# Altium PCB PCB1.PcbDoc
Units mil, origin at the board's own origin, x right, y up, seen from the top; angles counter-clockwise.
Board outline 6000 x 4000 mil, 2 copper layers (Top Layer, Bottom Layer); 160 components, 7 nets, 400 pads, 0 vias.
Unrouted connection lines stored in the file: 1.
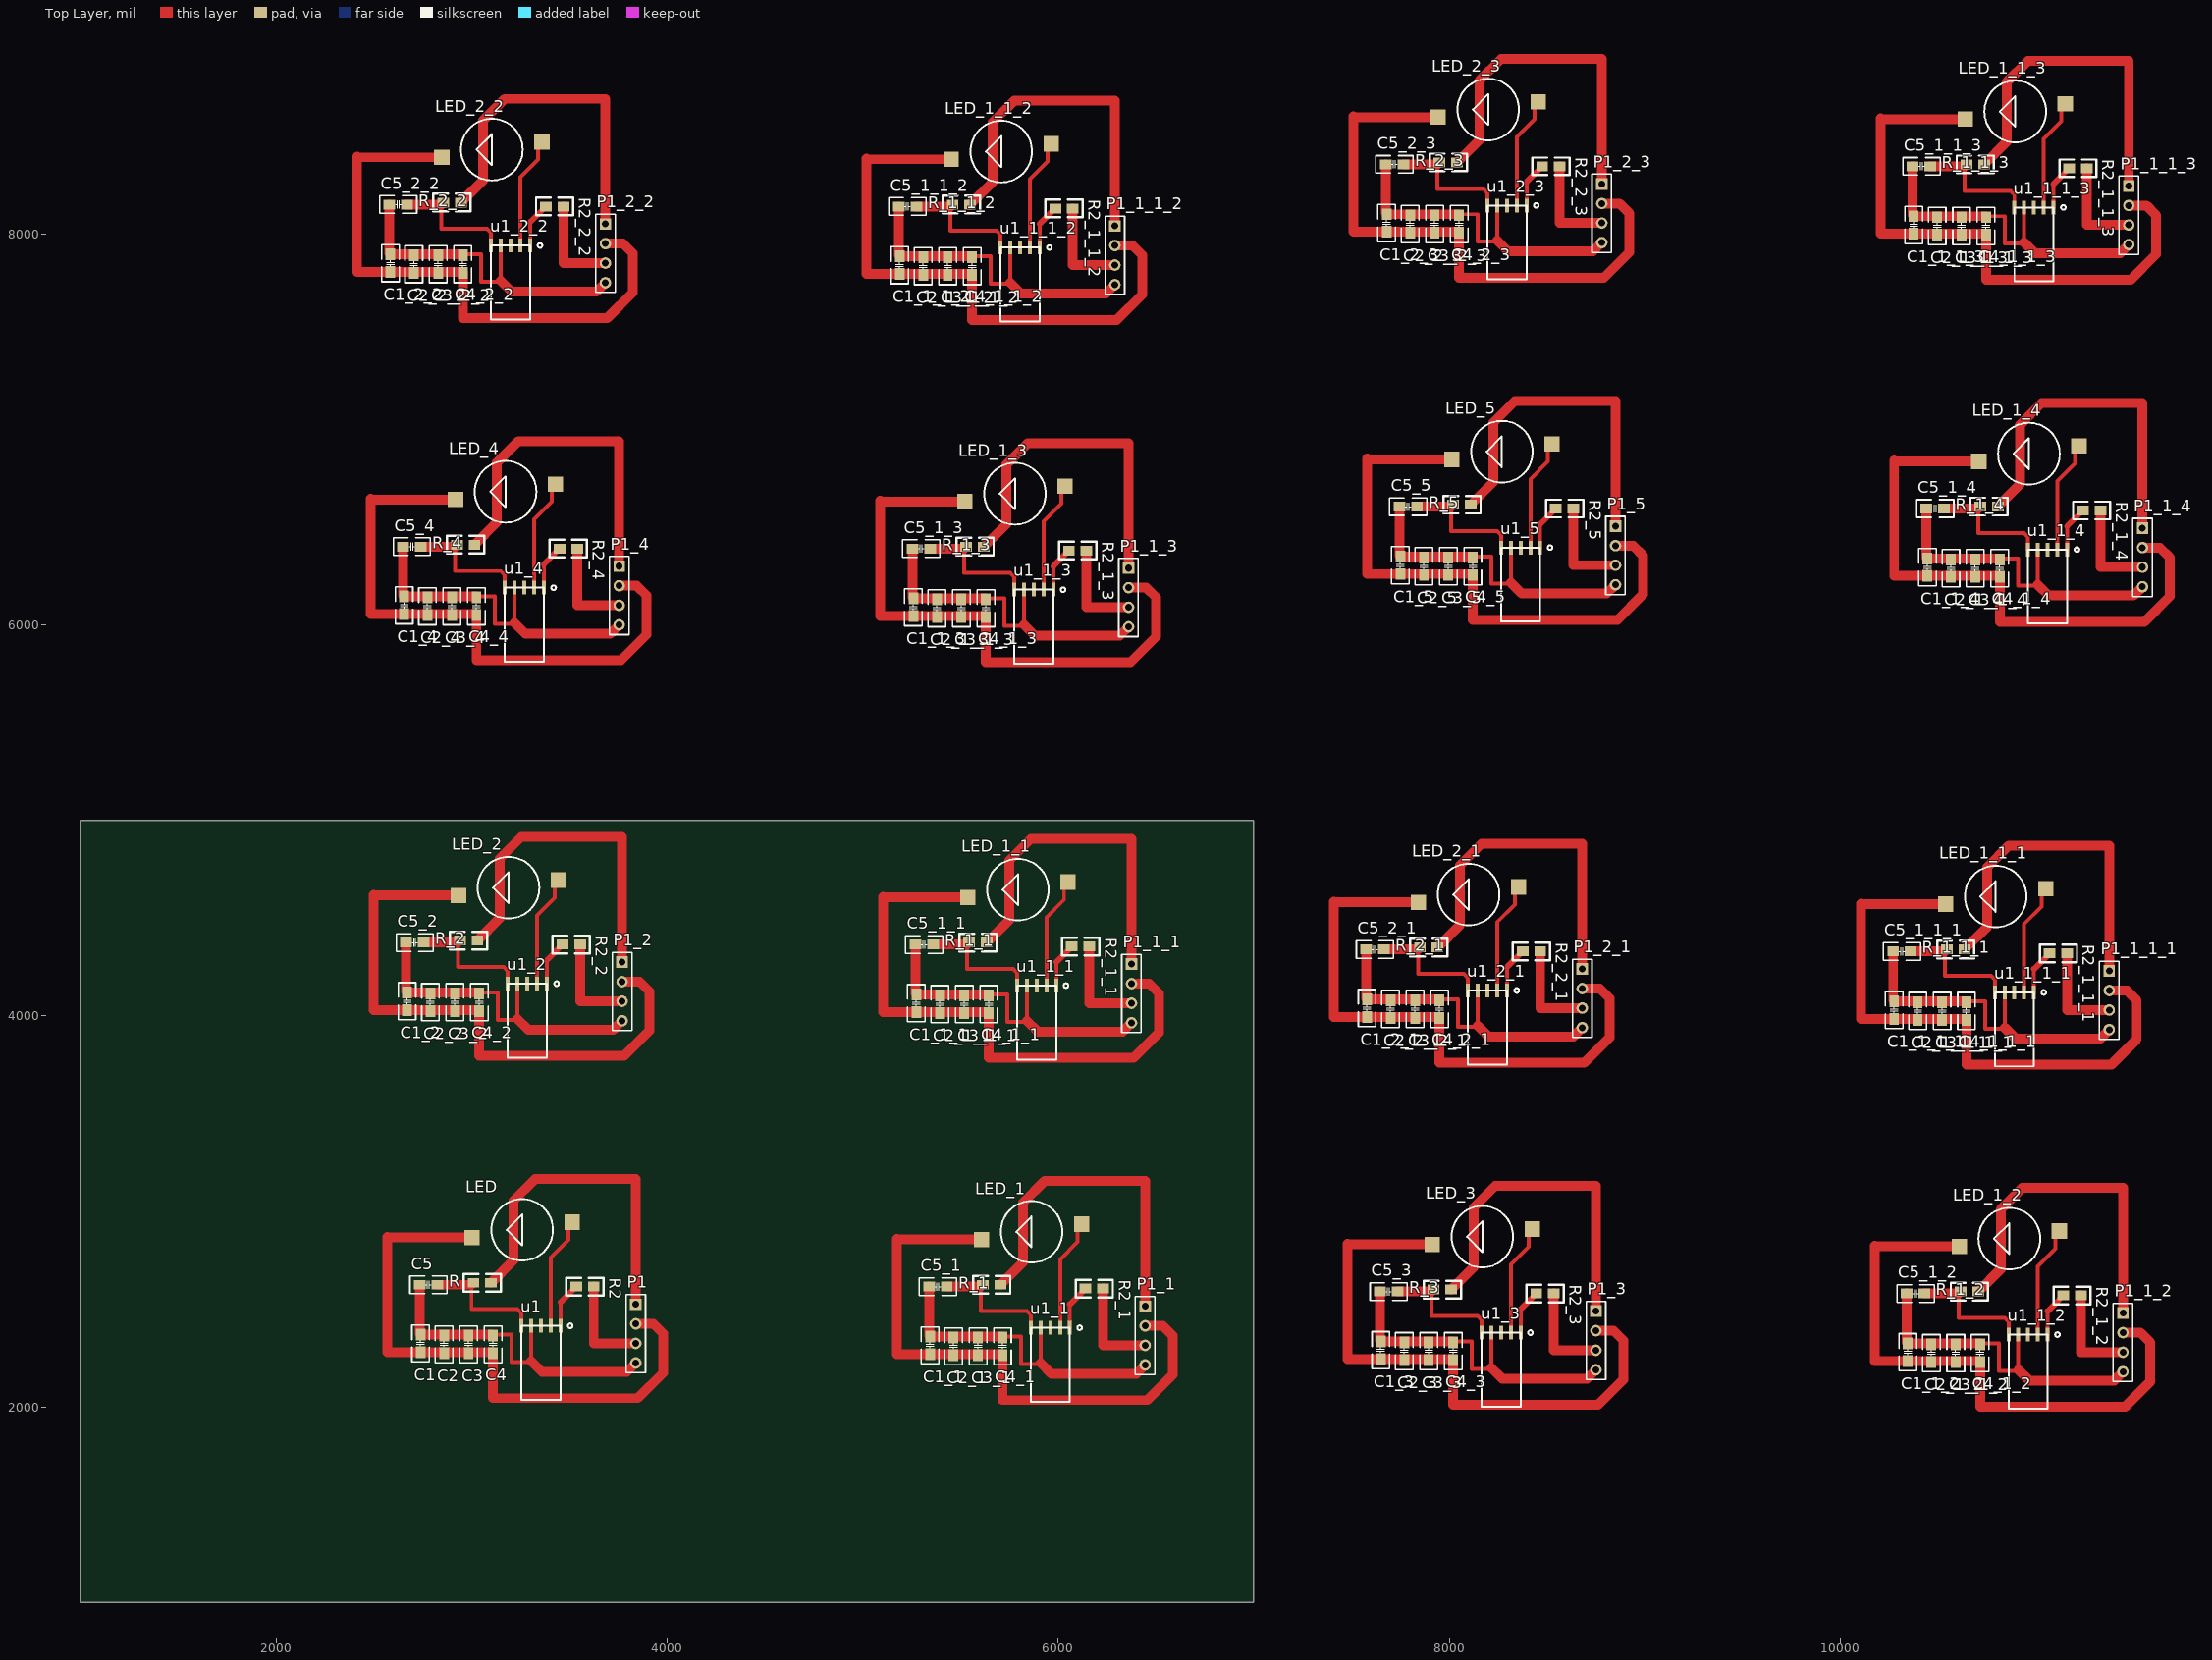
[diagram p0: Top Layer view]
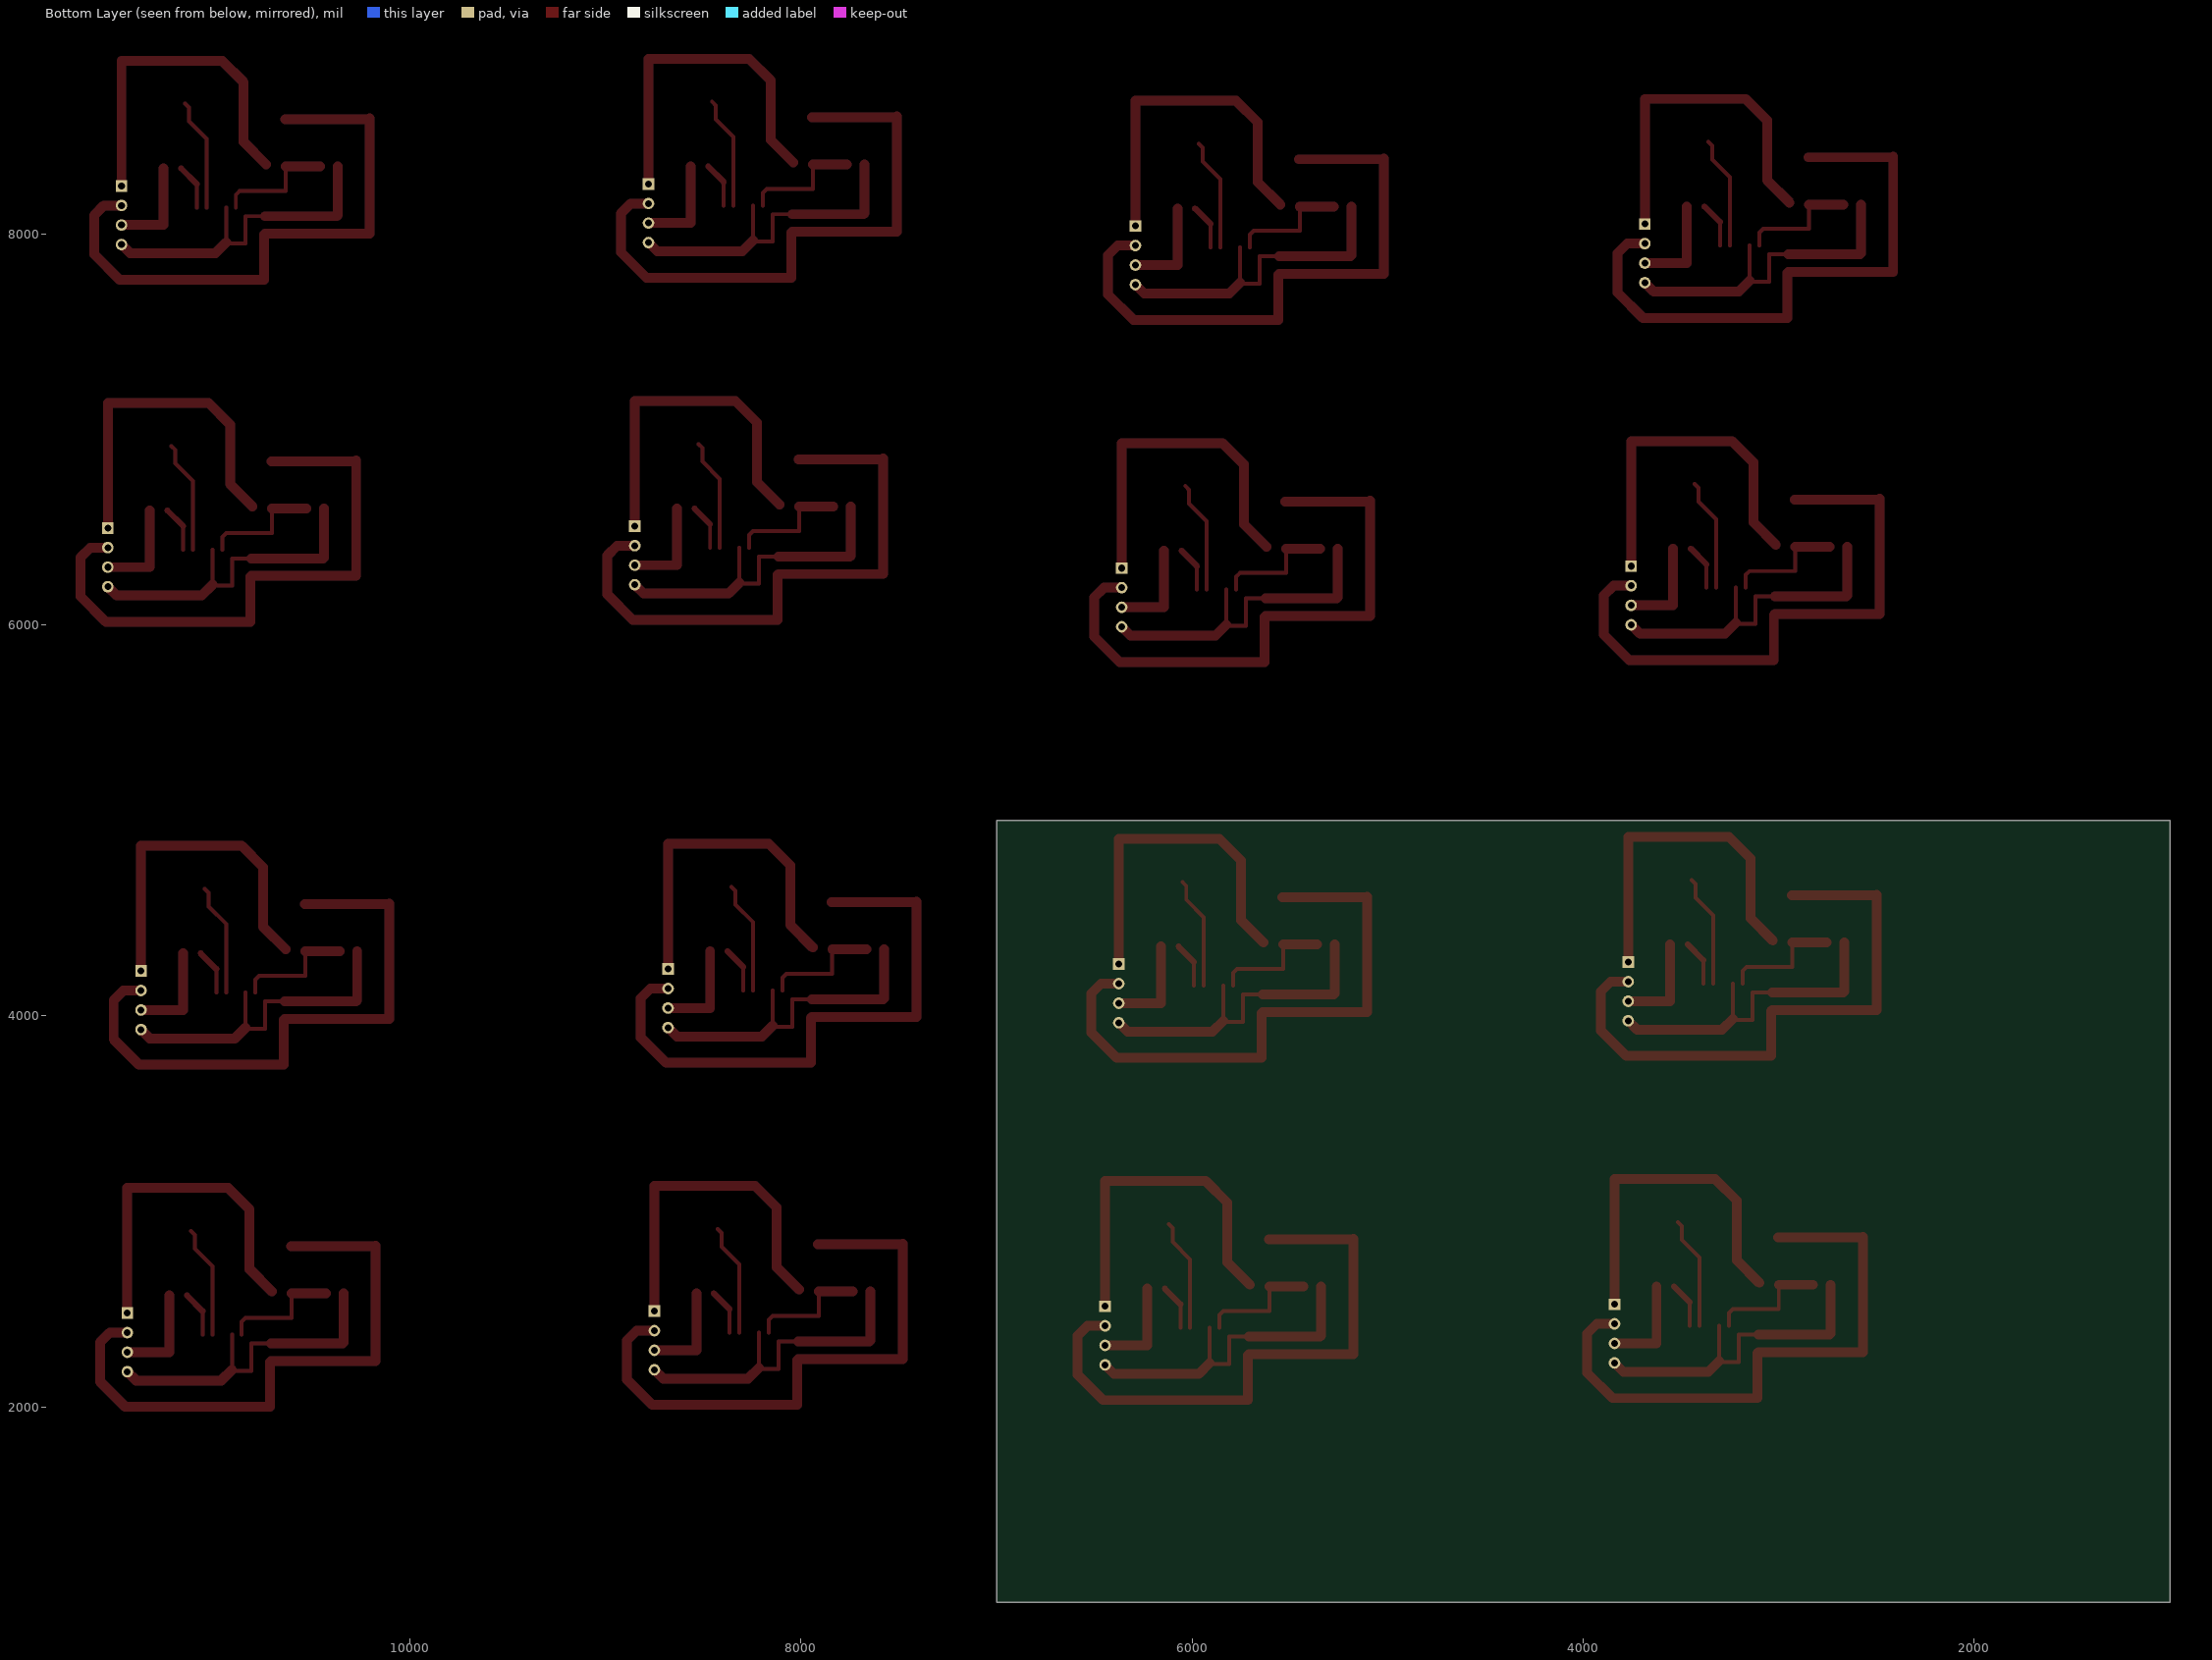
[diagram p1: Bottom Layer view, seen from below]

## Layer stack, top to bottom
Top Layer: signal copper 1.4
Dielectric: dielectric 12.6, FR-4, Dk 4.8
Bottom Layer: signal copper 1.4

## Board outline
1000,1000 7000,1000 7000,5000 1000,5000

## Design rules (kind name [scope] priority, off if disabled: settings)
Clearance [All] p1: gap=10
PolygonConnect [All] p1: connectstyle=Relief reliefconductorwidth=10 reliefentries=4 polygonreliefangle="90 Angle" airgapwidth=10
RoutingVias [All] p1: holewidth=28 width=50 viastyle="Through Hole" minholewidth=28 minwidth=50 maxholewidth=28 maxwidth=50
SolderMaskExpansion [All] p1: expansion=4
Width [All] p1: maxlimit=100 minlimit=20 preferedwidth=50
28 further rules are at their usual default settings.

## Classes and differential pairs
component class Sheet1: C1 C2 C3 C4 C5 LED P1 R R2 u1

## Components (designator, comment, footprint, x,y, rotation, side; value= is the part's Value field where it differs from the comment)
C1 "C_0.1uF" 0805C 2740,2280 r90 top
C1_1 "C_0.1uF" 0805C 5345,2270 r90 top (schematic designator C1)
C1_1_1 "C_0.1uF" 0805C 5275,4020 r90 top (schematic designator C1)
C1_1_1_1 "C_0.1uF" 0805C 10275,3985 r90 top (schematic designator C1)
C1_1_1_2 "C_0.1uF" 0805C 5190,7795 r90 top (schematic designator C1)
C1_1_1_3 "C_0.1uF" 0805C 10375,8000 r90 top (schematic designator C1)
C1_1_2 "C_0.1uF" 0805C 10345,2235 r90 top (schematic designator C1)
C1_1_3 "C_0.1uF" 0805C 5260,6045 r90 top (schematic designator C1)
C1_1_4 "C_0.1uF" 0805C 10445,6250 r90 top (schematic designator C1)
C1_2 "C_0.1uF" 0805C 2670,4030 r90 top (schematic designator C1)
C1_2_1 "C_0.1uF" 0805C 7580,3995 r90 top (schematic designator C1)
C1_2_2 "C_0.1uF" 0805C 2585,7805 r90 top (schematic designator C1)
C1_2_3 "C_0.1uF" 0805C 7680,8010 r90 top (schematic designator C1)
C1_3 "C_0.1uF" 0805C 7650,2245 r90 top (schematic designator C1)
C1_4 "C_0.1uF" 0805C 2655,6055 r90 top (schematic designator C1)
C1_5 "C_0.1uF" 0805C 7750,6260 r90 top (schematic designator C1)
C2 "C_0.1uF" 0805C 2860,2275 r90 top
C2_1 "C_0.1uF" 0805C 5465,2265 r90 top (schematic designator C2)
C2_1_1 "C_0.1uF" 0805C 5395,4015 r90 top (schematic designator C2)
C2_1_1_1 "C_0.1uF" 0805C 10395,3980 r90 top (schematic designator C2)
C2_1_1_2 "C_0.1uF" 0805C 5310,7790 r90 top (schematic designator C2)
C2_1_1_3 "C_0.1uF" 0805C 10495,7995 r90 top (schematic designator C2)
C2_1_2 "C_0.1uF" 0805C 10465,2230 r90 top (schematic designator C2)
C2_1_3 "C_0.1uF" 0805C 5380,6040 r90 top (schematic designator C2)
C2_1_4 "C_0.1uF" 0805C 10565,6245 r90 top (schematic designator C2)
C2_2 "C_0.1uF" 0805C 2790,4025 r90 top (schematic designator C2)
C2_2_1 "C_0.1uF" 0805C 7700,3990 r90 top (schematic designator C2)
C2_2_2 "C_0.1uF" 0805C 2705,7800 r90 top (schematic designator C2)
C2_2_3 "C_0.1uF" 0805C 7800,8005 r90 top (schematic designator C2)
C2_3 "C_0.1uF" 0805C 7770,2240 r90 top (schematic designator C2)
C2_4 "C_0.1uF" 0805C 2775,6050 r90 top (schematic designator C2)
C2_5 "C_0.1uF" 0805C 7870,6255 r90 top (schematic designator C2)
C3 "C_0.1uF" 0805C 2985,2275 r90 top
C3_1 "C_0.1uF" 0805C 5590,2265 r90 top (schematic designator C3)
C3_1_1 "C_0.1uF" 0805C 5520,4015 r90 top (schematic designator C3)
C3_1_1_1 "C_0.1uF" 0805C 10520,3980 r90 top (schematic designator C3)
C3_1_1_2 "C_0.1uF" 0805C 5435,7790 r90 top (schematic designator C3)
C3_1_1_3 "C_0.1uF" 0805C 10620,7995 r90 top (schematic designator C3)
C3_1_2 "C_0.1uF" 0805C 10590,2230 r90 top (schematic designator C3)
C3_1_3 "C_0.1uF" 0805C 5505,6040 r90 top (schematic designator C3)
C3_1_4 "C_0.1uF" 0805C 10690,6245 r90 top (schematic designator C3)
C3_2 "C_0.1uF" 0805C 2915,4025 r90 top (schematic designator C3)
C3_2_1 "C_0.1uF" 0805C 7825,3990 r90 top (schematic designator C3)
C3_2_2 "C_0.1uF" 0805C 2830,7800 r90 top (schematic designator C3)
C3_2_3 "C_0.1uF" 0805C 7925,8005 r90 top (schematic designator C3)
C3_3 "C_0.1uF" 0805C 7895,2240 r90 top (schematic designator C3)
C3_4 "C_0.1uF" 0805C 2900,6050 r90 top (schematic designator C3)
C3_5 "C_0.1uF" 0805C 7995,6255 r90 top (schematic designator C3)
C4 "C_0.1uF" 0805C 3110,2275 r90 top
C4_1 "C_0.1uF" 0805C 5715,2265 r90 top (schematic designator C4)
C4_1_1 "C_0.1uF" 0805C 5645,4015 r90 top (schematic designator C4)
C4_1_1_1 "C_0.1uF" 0805C 10645,3980 r90 top (schematic designator C4)
C4_1_1_2 "C_0.1uF" 0805C 5560,7790 r90 top (schematic designator C4)
C4_1_1_3 "C_0.1uF" 0805C 10745,7995 r90 top (schematic designator C4)
C4_1_2 "C_0.1uF" 0805C 10715,2230 r90 top (schematic designator C4)
C4_1_3 "C_0.1uF" 0805C 5630,6040 r90 top (schematic designator C4)
C4_1_4 "C_0.1uF" 0805C 10815,6245 r90 top (schematic designator C4)
C4_2 "C_0.1uF" 0805C 3040,4025 r90 top (schematic designator C4)
C4_2_1 "C_0.1uF" 0805C 7950,3990 r90 top (schematic designator C4)
C4_2_2 "C_0.1uF" 0805C 2955,7800 r90 top (schematic designator C4)
C4_2_3 "C_0.1uF" 0805C 8050,8005 r90 top (schematic designator C4)
C4_3 "C_0.1uF" 0805C 8020,2240 r90 top (schematic designator C4)
C4_4 "C_0.1uF" 0805C 3025,6050 r90 top (schematic designator C4)
C4_5 "C_0.1uF" 0805C 8120,6255 r90 top (schematic designator C4)
C5 "C_0.1uF" 0805C 2735,2625 r0 top
C5_1 "C_0.1uF" 0805C 5340,2615 r0 top (schematic designator C5)
C5_1_1 "C_0.1uF" 0805C 5270,4365 r0 top (schematic designator C5)
C5_1_1_1 "C_0.1uF" 0805C 10270,4330 r0 top (schematic designator C5)
C5_1_1_2 "C_0.1uF" 0805C 5185,8140 r0 top (schematic designator C5)
C5_1_1_3 "C_0.1uF" 0805C 10370,8345 r0 top (schematic designator C5)
C5_1_2 "C_0.1uF" 0805C 10340,2580 r0 top (schematic designator C5)
C5_1_3 "C_0.1uF" 0805C 5255,6390 r0 top (schematic designator C5)
C5_1_4 "C_0.1uF" 0805C 10440,6595 r0 top (schematic designator C5)
C5_2 "C_0.1uF" 0805C 2665,4375 r0 top (schematic designator C5)
C5_2_1 "C_0.1uF" 0805C 7575,4340 r0 top (schematic designator C5)
C5_2_2 "C_0.1uF" 0805C 2580,8150 r0 top (schematic designator C5)
C5_2_3 "C_0.1uF" 0805C 7675,8355 r0 top (schematic designator C5)
C5_3 "C_0.1uF" 0805C 7645,2590 r0 top (schematic designator C5)
C5_4 "C_0.1uF" 0805C 2650,6400 r0 top (schematic designator C5)
C5_5 "C_0.1uF" 0805C 7745,6605 r0 top (schematic designator C5)
LED "D-LED" led 3515,2945 r180 top
LED_1 "D-LED" led 6120,2935 r180 top (schematic designator LED)
LED_1_1 "D-LED" led 6050,4685 r180 top (schematic designator LED)
LED_1_1_1 "D-LED" led 11050,4650 r180 top (schematic designator LED)
LED_1_1_2 "D-LED" led 5965,8460 r180 top (schematic designator LED)
LED_1_1_3 "D-LED" led 11150,8665 r180 top (schematic designator LED)
LED_1_2 "D-LED" led 11120,2900 r180 top (schematic designator LED)
LED_1_3 "D-LED" led 6035,6710 r180 top (schematic designator LED)
LED_1_4 "D-LED" led 11220,6915 r180 top (schematic designator LED)
LED_2 "D-LED" led 3445,4695 r180 top (schematic designator LED)
LED_2_1 "D-LED" led 8355,4660 r180 top (schematic designator LED)
LED_2_2 "D-LED" led 3360,8470 r180 top (schematic designator LED)
LED_2_3 "D-LED" led 8455,8675 r180 top (schematic designator LED)
LED_3 "D-LED" led 8425,2910 r180 top (schematic designator LED)
LED_4 "D-LED" led 3430,6720 r180 top (schematic designator LED)
LED_5 "D-LED" led 8525,6925 r180 top (schematic designator LED)
P1 "Header 4" HDR1X4 3840,2525 r270 top
P1_1 "Header 4" HDR1X4 6445,2515 r270 top (schematic designator P1)
P1_1_1 "Header 4" HDR1X4 6375,4265 r270 top (schematic designator P1)
P1_1_1_1 "Header 4" HDR1X4 11375,4230 r270 top (schematic designator P1)
P1_1_1_2 "Header 4" HDR1X4 6290,8040 r270 top (schematic designator P1)
P1_1_1_3 "Header 4" HDR1X4 11475,8245 r270 top (schematic designator P1)
P1_1_2 "Header 4" HDR1X4 11445,2480 r270 top (schematic designator P1)
P1_1_3 "Header 4" HDR1X4 6360,6290 r270 top (schematic designator P1)
P1_1_4 "Header 4" HDR1X4 11545,6495 r270 top (schematic designator P1)
P1_2 "Header 4" HDR1X4 3770,4275 r270 top (schematic designator P1)
P1_2_1 "Header 4" HDR1X4 8680,4240 r270 top (schematic designator P1)
P1_2_2 "Header 4" HDR1X4 3685,8050 r270 top (schematic designator P1)
P1_2_3 "Header 4" HDR1X4 8780,8255 r270 top (schematic designator P1)
P1_3 "Header 4" HDR1X4 8750,2490 r270 top (schematic designator P1)
P1_4 "Header 4" HDR1X4 3755,6300 r270 top (schematic designator P1)
P1_5 "Header 4" HDR1X4 8850,6505 r270 top (schematic designator P1)
R "Res2" 0805 3010,2635 r0 top
R2 "Res2" 0805 3625,2615 r180 top (schematic designator 2)
R2_1 "Res2" 0805 6230,2605 r180 top (schematic designator 2)
R2_1_1 "Res2" 0805 6160,4355 r180 top (schematic designator 2)
R2_1_1_1 "Res2" 0805 11160,4320 r180 top (schematic designator 2)
R2_1_1_2 "Res2" 0805 6075,8130 r180 top (schematic designator 2)
R2_1_1_3 "Res2" 0805 11260,8335 r180 top (schematic designator 2)
R2_1_2 "Res2" 0805 11230,2570 r180 top (schematic designator 2)
R2_1_3 "Res2" 0805 6145,6380 r180 top (schematic designator 2)
R2_1_4 "Res2" 0805 11330,6585 r180 top (schematic designator 2)
R2_2 "Res2" 0805 3555,4365 r180 top (schematic designator 2)
R2_2_1 "Res2" 0805 8465,4330 r180 top (schematic designator 2)
R2_2_2 "Res2" 0805 3470,8140 r180 top (schematic designator 2)
R2_2_3 "Res2" 0805 8565,8345 r180 top (schematic designator 2)
R2_3 "Res2" 0805 8535,2580 r180 top (schematic designator 2)
R2_4 "Res2" 0805 3540,6390 r180 top (schematic designator 2)
R2_5 "Res2" 0805 8635,6595 r180 top (schematic designator 2)
R_1 "Res2" 0805 5615,2625 r0 top (schematic designator R)
R_1_1 "Res2" 0805 5545,4375 r0 top (schematic designator R)
R_1_1_1 "Res2" 0805 10545,4340 r0 top (schematic designator R)
R_1_1_2 "Res2" 0805 5460,8150 r0 top (schematic designator R)
R_1_1_3 "Res2" 0805 10645,8355 r0 top (schematic designator R)
R_1_2 "Res2" 0805 10615,2590 r0 top (schematic designator R)
R_1_3 "Res2" 0805 5530,6400 r0 top (schematic designator R)
R_1_4 "Res2" 0805 10715,6605 r0 top (schematic designator R)
R_2 "Res2" 0805 2940,4385 r0 top (schematic designator R)
R_2_1 "Res2" 0805 7850,4350 r0 top (schematic designator R)
R_2_2 "Res2" 0805 2855,8160 r0 top (schematic designator R)
R_2_3 "Res2" 0805 7950,8365 r0 top (schematic designator R)
R_3 "Res2" 0805 7920,2600 r0 top (schematic designator R)
R_4 "Res2" 0805 2925,6410 r0 top (schematic designator R)
R_5 "Res2" 0805 8020,6615 r0 top (schematic designator R)
u1 "Header 5" DD311 3455,2415 r180 top
u1_1 "Header 5" DD311 6060,2405 r180 top (schematic designator u1)
u1_1_1 "Header 5" DD311 5990,4155 r180 top (schematic designator u1)
u1_1_1_1 "Header 5" DD311 10990,4120 r180 top (schematic designator u1)
u1_1_1_2 "Header 5" DD311 5905,7930 r180 top (schematic designator u1)
u1_1_1_3 "Header 5" DD311 11090,8135 r180 top (schematic designator u1)
u1_1_2 "Header 5" DD311 11060,2370 r180 top (schematic designator u1)
u1_1_3 "Header 5" DD311 5975,6180 r180 top (schematic designator u1)
u1_1_4 "Header 5" DD311 11160,6385 r180 top (schematic designator u1)
u1_2 "Header 5" DD311 3385,4165 r180 top (schematic designator u1)
u1_2_1 "Header 5" DD311 8295,4130 r180 top (schematic designator u1)
u1_2_2 "Header 5" DD311 3300,7940 r180 top (schematic designator u1)
u1_2_3 "Header 5" DD311 8395,8145 r180 top (schematic designator u1)
u1_3 "Header 5" DD311 8365,2380 r180 top (schematic designator u1)
u1_4 "Header 5" DD311 3370,6190 r180 top (schematic designator u1)
u1_5 "Header 5" DD311 8465,6395 r180 top (schematic designator u1)

## Footprints (in the part's own frame and the unit in brackets; to place one, negate y for a bottom-side part, rotate by r counter-clockwise, add the part's x,y. Pads: shape width x height; smd on the part's side, far side on the other; paste and mask are expansions set on the pad)
0805 [mil] "1/8W"
  rect 60x50 smd: 1(0,0) 2(90,0)
  silkscreen extent -50,-45 140,45
0805C [mil]
  rect 60x50 smd: 1(0,0) 2(90,0)
  silkscreen extent -50,-45 140,45
DD311 [mil]
  rect 20.08x70 smd: 1(0,0) 2(50,0) 3(100,0) 4(150,0) 5(200,0)
  silkscreen extent -62,-12 200,378
HDR1X4 [mm] "Connector; Header; 4 Position"
  rect 1.5x1.5 hole 0.9: 1(0,0)
  round 1.5 hole 0.9: 2(2.54,0) 3(5.08,0) 4(7.62,0)
  silkscreen extent -1.27,-1.27 8.89,1.27
led [mm]
  rect 2x2 smd: 1(0,0) 2(13,2)
  silkscreen extent 2.5,-3 10.5,5

## Part data
C1 C1_1 C1_1_1 C1_1_1_1 C1_1_1_2 C1_1_1_3 C1_1_2 C1_1_3 C1_1_4 C1_2 C1_2_1 C1_2_2 C1_2_3 C1_3 C1_4 C1_5 C2 C2_1 C2_1_1 C2_1_1_1 C2_1_1_2 C2_1_1_3 C2_1_2 C2_1_3 C2_1_4 C2_2 C2_2_1 C2_2_2 C2_2_3 C2_3 C2_4 C2_5 C3 C3_1 C3_1_1 C3_1_1_1 C3_1_1_2 C3_1_1_3 C3_1_2 C3_1_3 C3_1_4 C3_2 C3_2_1 C3_2_2 C3_2_3 C3_3 C3_4 C3_5 C4 C4_1 C4_1_1 C4_1_1_1 C4_1_1_2 C4_1_1_3 C4_1_2 C4_1_3 C4_1_4 C4_2 C4_2_1 C4_2_2 C4_2_3 C4_3 C4_4 C4_5 C5 C5_1 C5_1_1 C5_1_1_1 C5_1_1_2 C5_1_1_3 C5_1_2 C5_1_3 C5_1_4 C5_2 C5_2_1 C5_2_2 C5_2_3 C5_3 C5_4 C5_5: "SMD-CAP"
LED LED_1 LED_1_1 LED_1_1_1 LED_1_1_2 LED_1_1_3 LED_1_2 LED_1_3 LED_1_4 LED_2 LED_2_1 LED_2_2 LED_2_3 LED_3 LED_4 LED_5: "LED"
P1 P1_1 P1_1_1 P1_1_1_1 P1_1_1_2 P1_1_1_3 P1_1_2 P1_1_3 P1_1_4 P1_2 P1_2_1 P1_2_2 P1_2_3 P1_3 P1_4 P1_5: "Header, 4-Pin"
R R2 R2_1 R2_1_1 R2_1_1_1 R2_1_1_2 R2_1_1_3 R2_1_2 R2_1_3 R2_1_4 R2_2 R2_2_1 R2_2_2 R2_2_3 R2_3 R2_4 R2_5 R_1 R_1_1 R_1_1_1 R_1_1_2 R_1_1_3 R_1_2 R_1_3 R_1_4 R_2 R_2_1 R_2_2 R_2_3 R_3 R_4 R_5: "Resistor"
u1 u1_1 u1_1_1 u1_1_1_1 u1_1_1_2 u1_1_1_3 u1_1_2 u1_1_3 u1_1_4 u1_2 u1_2_1 u1_2_2 u1_2_3 u1_3 u1_4 u1_5: "Header, 5-Pin"

## Nets (pads, with @x,y where several pads share a name; then routed paths per layer and width w, separated by ;. In a path a pad name is that pad's centre, name@x,y a point inside that pad or via, vN(x,y) a via of type N, cw(c..) or ccw(c..) an arc to the next point about the centre after c; other vN are vias at no path point)
5V: C1.1 C2.1 C3.1 C4.1 LED.2 P1.2 | length 3081.4
  Top Layer w50: LED.2 2573.74,2866.26 2570,2870 2570,2280 C1.1 3105,2280 C4.1 3110,2045 3850,2045 3980,2175 3980,2375 3930,2425 P1.2
12V: P1.3 R2.1 | length 505
  Top Layer w50: R2.1 3625,2325 P1.3
GND: C1.2 C2.2 C3.2 C4.2 C5.1 P1.4 u1.3 u1.4 | length 1733.5
  Top Layer w20: C4.2@3105,2370 3205,2370 3205,2230 3320,2230 ; 3305,2235 u1.4
  Top Layer w50: C5.1 2735,2375 C1.2 C4.2@3105,2370 ; 3305,2235 3360,2180 3795,2180 P1.4
Net2_2: R2.2 u1.1 | length 233.1
  Top Layer w20: u1.1 3455,2535
  Top Layer w30: 3455,2535 R2.2
NetC5_2: C5.2 R.1 u1.5 | length 628.3
  Top Layer w20: R.1@3000,2625 3000,2500 3235,2500 3255,2480 u1.5
  Top Layer w50: C5.2 R.1@3000,2625
NetLED_A: LED.1 u1.2 | length 575.6
  Top Layer w20: u1.2 3405,2765 3495,2855 3495,2925 LED.1
TX: P1.1 R.2 | length 1778.2
  Top Layer w50: R.2 3215,2750 3215,3055 3325,3165 3840,3165 P1.1
pads on no net: C1_1.1 C1_1.2 C1_1_1.1 C1_1_1.2 C1_1_1_1.1 C1_1_1_1.2 C1_1_1_2.1 C1_1_1_2.2 C1_1_1_3.1 C1_1_1_3.2 C1_1_2.1 C1_1_2.2 C1_1_3.1 C1_1_3.2 C1_1_4.1 C1_1_4.2 C1_2.1 C1_2.2 C1_2_1.1 C1_2_1.2 C1_2_2.1 C1_2_2.2 C1_2_3.1 C1_2_3.2 C1_3.1 C1_3.2 C1_4.1 C1_4.2 C1_5.1 C1_5.2 C2_1.1 C2_1.2 C2_1_1.1 C2_1_1.2 C2_1_1_1.1 C2_1_1_1.2 C2_1_1_2.1 C2_1_1_2.2 C2_1_1_3.1 C2_1_1_3.2 C2_1_2.1 C2_1_2.2 C2_1_3.1 C2_1_3.2 C2_1_4.1 C2_1_4.2 C2_2.1 C2_2.2 C2_2_1.1 C2_2_1.2 C2_2_2.1 C2_2_2.2 C2_2_3.1 C2_2_3.2 C2_3.1 C2_3.2 C2_4.1 C2_4.2 C2_5.1 C2_5.2 C3_1.1 C3_1.2 C3_1_1.1 C3_1_1.2 C3_1_1_1.1 C3_1_1_1.2 C3_1_1_2.1 C3_1_1_2.2 C3_1_1_3.1 C3_1_1_3.2 C3_1_2.1 C3_1_2.2 C3_1_3.1 C3_1_3.2 C3_1_4.1 C3_1_4.2 C3_2.1 C3_2.2 C3_2_1.1 C3_2_1.2 C3_2_2.1 C3_2_2.2 C3_2_3.1 C3_2_3.2 C3_3.1 C3_3.2 C3_4.1 C3_4.2 C3_5.1 C3_5.2 C4_1.1 C4_1.2 C4_1_1.1 C4_1_1.2 C4_1_1_1.1 C4_1_1_1.2 C4_1_1_2.1 C4_1_1_2.2 C4_1_1_3.1 C4_1_1_3.2 C4_1_2.1 C4_1_2.2 C4_1_3.1 C4_1_3.2 C4_1_4.1 C4_1_4.2 C4_2.1 C4_2.2 C4_2_1.1 C4_2_1.2 C4_2_2.1 C4_2_2.2 C4_2_3.1 C4_2_3.2 C4_3.1 C4_3.2 C4_4.1 C4_4.2 C4_5.1 C4_5.2 C5_1.1 C5_1.2 C5_1_1.1 C5_1_1.2 C5_1_1_1.1 C5_1_1_1.2 C5_1_1_2.1 C5_1_1_2.2 C5_1_1_3.1 C5_1_1_3.2 C5_1_2.1 C5_1_2.2 C5_1_3.1 C5_1_3.2 C5_1_4.1 C5_1_4.2 C5_2.1 C5_2.2 C5_2_1.1 C5_2_1.2 C5_2_2.1 C5_2_2.2 C5_2_3.1 C5_2_3.2 C5_3.1 C5_3.2 C5_4.1 C5_4.2 C5_5.1 C5_5.2 LED_1.1 LED_1.2 LED_1_1.1 LED_1_1.2 LED_1_1_1.1 LED_1_1_1.2 LED_1_1_2.1 LED_1_1_2.2 LED_1_1_3.1 LED_1_1_3.2 LED_1_2.1 LED_1_2.2 LED_1_3.1 LED_1_3.2 LED_1_4.1 LED_1_4.2 LED_2.1 LED_2.2 LED_2_1.1 LED_2_1.2 LED_2_2.1 LED_2_2.2 LED_2_3.1 LED_2_3.2 LED_3.1 LED_3.2 LED_4.1 LED_4.2 LED_5.1 LED_5.2 P1_1.1 P1_1.2 P1_1.3 P1_1.4 P1_1_1.1 P1_1_1.2 P1_1_1.3 P1_1_1.4 P1_1_1_1.1 P1_1_1_1.2 P1_1_1_1.3 P1_1_1_1.4 P1_1_1_2.1 P1_1_1_2.2 P1_1_1_2.3 P1_1_1_2.4 P1_1_1_3.1 P1_1_1_3.2 P1_1_1_3.3 P1_1_1_3.4 P1_1_2.1 P1_1_2.2 P1_1_2.3 P1_1_2.4 P1_1_3.1 P1_1_3.2 P1_1_3.3 P1_1_3.4 P1_1_4.1 P1_1_4.2 P1_1_4.3 P1_1_4.4 P1_2.1 P1_2.2 P1_2.3 P1_2.4 P1_2_1.1 P1_2_1.2 P1_2_1.3 P1_2_1.4 P1_2_2.1 P1_2_2.2 P1_2_2.3 P1_2_2.4 P1_2_3.1 P1_2_3.2 P1_2_3.3 P1_2_3.4 P1_3.1 P1_3.2 P1_3.3 P1_3.4 P1_4.1 P1_4.2 P1_4.3 P1_4.4 P1_5.1 P1_5.2 P1_5.3 P1_5.4 R2_1.1 R2_1.2 R2_1_1.1 R2_1_1.2 R2_1_1_1.1 R2_1_1_1.2 R2_1_1_2.1 R2_1_1_2.2 R2_1_1_3.1 R2_1_1_3.2 R2_1_2.1 R2_1_2.2 R2_1_3.1 R2_1_3.2 R2_1_4.1 R2_1_4.2 R2_2.1 R2_2.2 R2_2_1.1 R2_2_1.2 R2_2_2.1 R2_2_2.2 R2_2_3.1 R2_2_3.2 R2_3.1 R2_3.2 R2_4.1 R2_4.2 R2_5.1 R2_5.2 R_1.1 R_1.2 R_1_1.1 R_1_1.2 R_1_1_1.1 R_1_1_1.2 R_1_1_2.1 R_1_1_2.2 R_1_1_3.1 R_1_1_3.2 R_1_2.1 R_1_2.2 R_1_3.1 R_1_3.2 R_1_4.1 R_1_4.2 R_2.1 R_2.2 R_2_1.1 R_2_1.2 R_2_2.1 R_2_2.2 R_2_3.1 R_2_3.2 R_3.1 R_3.2 R_4.1 R_4.2 R_5.1 R_5.2 u1_1.1 u1_1.2 u1_1.3 u1_1.4 u1_1.5 u1_1_1.1 u1_1_1.2 u1_1_1.3 u1_1_1.4 u1_1_1.5 u1_1_1_1.1 u1_1_1_1.2 u1_1_1_1.3 u1_1_1_1.4 u1_1_1_1.5 u1_1_1_2.1 u1_1_1_2.2 u1_1_1_2.3 u1_1_1_2.4 u1_1_1_2.5 u1_1_1_3.1 u1_1_1_3.2 u1_1_1_3.3 u1_1_1_3.4 u1_1_1_3.5 u1_1_2.1 u1_1_2.2 u1_1_2.3 u1_1_2.4 u1_1_2.5 u1_1_3.1 u1_1_3.2 u1_1_3.3 u1_1_3.4 u1_1_3.5 u1_1_4.1 u1_1_4.2 u1_1_4.3 u1_1_4.4 u1_1_4.5 u1_2.1 u1_2.2 u1_2.3 u1_2.4 u1_2.5 u1_2_1.1 u1_2_1.2 u1_2_1.3 u1_2_1.4 u1_2_1.5 u1_2_2.1 u1_2_2.2 u1_2_2.3 u1_2_2.4 u1_2_2.5 u1_2_3.1 u1_2_3.2 u1_2_3.3 u1_2_3.4 u1_2_3.5 u1_3.1 u1_3.2 u1_3.3 u1_3.4 u1_3.5 u1_4.1 u1_4.2 u1_4.3 u1_4.4 u1_4.5 u1_5.1 u1_5.2 u1_5.3 u1_5.4 u1_5.5
copper on no net: | length 128025.6
  Top Layer w20: 2845,8150 2845,8025 3080,8025 3100,8005 3100,7940 ; 2915,6400 2915,6275 3150,6275 3170,6255 3170,6190 ; 2930,4375 2930,4250 3165,4250 3185,4230 3185,4165 ; 2950,7895 3050,7895 3050,7755 3165,7755 ; 3020,6145 3120,6145 3120,6005 3235,6005 ; 3035,4120 3135,4120 3135,3980 3250,3980 ; 3150,7760 3150,7940 ; 3220,6010 3220,6190 ; 3235,3985 3235,4165 ; 3250,7940 3250,8290 3340,8380 3340,8450 3360,8470 ; 3300,7940 3300,8060 ; 3320,6190 3320,6540 3410,6630 3410,6700 3430,6720 ; 3335,4165 3335,4515 3425,4605 3425,4675 3445,4695 ; 3370,6190 3370,6310 ; 3385,4165 3385,4285 ; 5450,8140 5450,8015 5685,8015 5705,7995 5705,7930 ; 5520,6390 5520,6265 5755,6265 5775,6245 5775,6180 ; 5535,4365 5535,4240 5770,4240 5790,4220 5790,4155 ; 5555,7885 5655,7885 5655,7745 5770,7745 ; 5605,2615 5605,2490 5840,2490 5860,2470 5860,2405 ; 5625,6135 5725,6135 5725,5995 5840,5995 ; 5640,4110 5740,4110 5740,3970 5855,3970 ; 5710,2360 5810,2360 5810,2220 5925,2220 ; 5755,7750 5755,7930 ; 5825,6000 5825,6180 ; 5840,3975 5840,4155 ; 5855,7930 5855,8280 5945,8370 5945,8440 5965,8460 ; 5905,7930 5905,8050 ; 5910,2225 5910,2405 ; 5925,6180 5925,6530 6015,6620 6015,6690 6035,6710 ; 5940,4155 5940,4505 6030,4595 6030,4665 6050,4685 ; 5975,6180 5975,6300 ; 5990,4155 5990,4275 ; 6010,2405 6010,2755 6100,2845 6100,2915 6120,2935 ; 6060,2405 6060,2525 ; 7840,4340 7840,4215 8075,4215 8095,4195 8095,4130 ; 7910,2590 7910,2465 8145,2465 8165,2445 8165,2380 ; 7940,8355 7940,8230 8175,8230 8195,8210 8195,8145 ; 7945,4085 8045,4085 8045,3945 8160,3945 ; 8010,6605 8010,6480 8245,6480 8265,6460 8265,6395 ; 8015,2335 8115,2335 8115,2195 8230,2195 ; 8045,8100 8145,8100 8145,7960 8260,7960 ; 8115,6350 8215,6350 8215,6210 8330,6210 ; 8145,3950 8145,4130 ; 8215,2200 8215,2380 ; 8245,4130 8245,4480 8335,4570 8335,4640 8355,4660 ; 8245,7965 8245,8145 ; 8295,4130 8295,4250 ; 8315,2380 8315,2730 8405,2820 8405,2890 8425,2910 ; 8315,6215 8315,6395 ; 8345,8145 8345,8495 8435,8585 8435,8655 8455,8675 ; 8365,2380 8365,2500 ; 8395,8145 8395,8265 ; 8415,6395 8415,6745 8505,6835 8505,6905 8525,6925 ; 8465,6395 8465,6515 ; 10535,4330 10535,4205 10770,4205 10790,4185 10790,4120 ; 10605,2580 10605,2455 10840,2455 10860,2435 10860,2370 ; 10635,8345 10635,8220 10870,8220 10890,8200 10890,8135 ; 10640,4075 10740,4075 10740,3935 10855,3935 ; 10705,6595 10705,6470 10940,6470 10960,6450 10960,6385 ; 10710,2325 10810,2325 10810,2185 10925,2185 ; 10740,8090 10840,8090 10840,7950 10955,7950 ; 10810,6340 10910,6340 10910,6200 11025,6200 ; 10840,3940 10840,4120 ; 10910,2190 10910,2370 ; 10940,4120 10940,4470 11030,4560 11030,4630 11050,4650 ; 10940,7955 10940,8135 ; 10990,4120 10990,4240 ; 11010,2370 11010,2720 11100,2810 11100,2880 11120,2900 ; 11010,6205 11010,6385 ; 11040,8135 11040,8485 11130,8575 11130,8645 11150,8665 ; 11060,2370 11060,2490 ; 11090,8135 11090,8255 ; 11110,6385 11110,6735 11200,6825 11200,6895 11220,6915 ; 11160,6385 11160,6505
  Top Layer w30: 3300,8060 3380,8140 ; 3370,6310 3450,6390 ; 3385,4285 3465,4365 ; 5905,8050 5985,8130 ; 5975,6300 6055,6380 ; 5990,4275 6070,4355 ; 6060,2525 6140,2605 ; 8295,4250 8375,4330 ; 8365,2500 8445,2580 ; 8395,8265 8475,8345 ; 8465,6515 8545,6595 ; 10990,4240 11070,4320 ; 11060,2490 11140,2570 ; 11090,8255 11170,8335 ; 11160,6505 11240,6585
  Top Layer w50: 2580,8150 2580,7900 2585,7895 2950,7895 ; 2650,6400 2650,6150 2655,6145 3020,6145 ; 2665,4375 2665,4125 2670,4120 3035,4120 ; 2670,8150 2845,8150 ; 2740,6400 2915,6400 ; 2755,4375 2930,4375 ; 2848.19,8391.26 2418.74,8391.26 2415,8395 2415,7805 2585,7805 2950,7805 2955,7800 2955,7570 3695,7570 3825,7700 3825,7900 3775,7950 3685,7950 ; 2918.19,6641.26 2488.74,6641.26 2485,6645 2485,6055 2655,6055 3020,6055 3025,6050 3025,5820 3765,5820 3895,5950 3895,6150 3845,6200 3755,6200 ; 2933.19,4616.26 2503.74,4616.26 2500,4620 2500,4030 2670,4030 3035,4030 3040,4025 3040,3795 3780,3795 3910,3925 3910,4125 3860,4175 3770,4175 ; 2945,8160 3060,8275 3060,8580 3170,8690 3685,8690 3685,8050 ; 3015,6410 3130,6525 3130,6830 3240,6940 3755,6940 3755,6300 ; 3030,4385 3145,4500 3145,4805 3255,4915 3770,4915 3770,4275 ; 3150,7760 3205,7705 3640,7705 3685,7750 ; 3220,6010 3275,5955 3710,5955 3755,6000 ; 3235,3985 3290,3930 3725,3930 3770,3975 ; 3470,8140 3470,7850 3685,7850 ; 3540,6390 3540,6100 3755,6100 ; 3555,4365 3555,4075 3770,4075 ; 5185,8140 5185,7890 5190,7885 5555,7885 ; 5255,6390 5255,6140 5260,6135 5625,6135 ; 5270,4365 5270,4115 5275,4110 5640,4110 ; 5275,8140 5450,8140 ; 5340,2615 5340,2365 5345,2360 5710,2360 ; 5345,6390 5520,6390 ; 5360,4365 5535,4365 ; 5430,2615 5605,2615 ; 5453.19,8381.26 5023.74,8381.26 5020,8385 5020,7795 5190,7795 5555,7795 5560,7790 5560,7560 6300,7560 6430,7690 6430,7890 6380,7940 6290,7940 ; 5523.19,6631.26 5093.74,6631.26 5090,6635 5090,6045 5260,6045 5625,6045 5630,6040 5630,5810 6370,5810 6500,5940 6500,6140 6450,6190 6360,6190 ; 5538.19,4606.26 5108.74,4606.26 5105,4610 5105,4020 5275,4020 5640,4020 5645,4015 5645,3785 6385,3785 6515,3915 6515,4115 6465,4165 6375,4165 ; 5550,8150 5665,8265 5665,8570 5775,8680 6290,8680 6290,8040 ; 5608.19,2856.26 5178.74,2856.26 5175,2860 5175,2270 5345,2270 5710,2270 5715,2265 5715,2035 6455,2035 6585,2165 6585,2365 6535,2415 6445,2415 ; 5620,6400 5735,6515 5735,6820 5845,6930 6360,6930 6360,6290 ; 5635,4375 5750,4490 5750,4795 5860,4905 6375,4905 6375,4265 ; 5705,2625 5820,2740 5820,3045 5930,3155 6445,3155 6445,2515 ; 5755,7750 5810,7695 6245,7695 6290,7740 ; 5825,6000 5880,5945 6315,5945 6360,5990 ; 5840,3975 5895,3920 6330,3920 6375,3965 ; 5910,2225 5965,2170 6400,2170 6445,2215 ; 6075,8130 6075,7840 6290,7840 ; 6145,6380 6145,6090 6360,6090 ; 6160,4355 6160,4065 6375,4065 ; 6230,2605 6230,2315 6445,2315 ; 7575,4340 7575,4090 7580,4085 7945,4085 ; 7645,2590 7645,2340 7650,2335 8015,2335 ; 7665,4340 7840,4340 ; 7675,8355 7675,8105 7680,8100 8045,8100 ; 7735,2590 7910,2590 ; 7745,6605 7745,6355 7750,6350 8115,6350 ; 7765,8355 7940,8355 ; 7835,6605 8010,6605 ; 7843.19,4581.26 7413.74,4581.26 7410,4585 7410,3995 7580,3995 7945,3995 7950,3990 7950,3760 8690,3760 8820,3890 8820,4090 8770,4140 8680,4140 ; 7913.19,2831.26 7483.74,2831.26 7480,2835 7480,2245 7650,2245 8015,2245 8020,2240 8020,2010 8760,2010 8890,2140 8890,2340 8840,2390 8750,2390 ; 7940,4350 8055,4465 8055,4770 8165,4880 8680,4880 8680,4240 ; 7943.19,8596.26 7513.74,8596.26 7510,8600 7510,8010 7680,8010 8045,8010 8050,8005 8050,7775 8790,7775 8920,7905 8920,8105 8870,8155 8780,8155 ; 8010,2600 8125,2715 8125,3020 8235,3130 8750,3130 8750,2490 ; 8013.19,6846.26 7583.74,6846.26 7580,6850 7580,6260 7750,6260 8115,6260 8120,6255 8120,6025 8860,6025 8990,6155 8990,6355 8940,6405 8850,6405 ; 8040,8365 8155,8480 8155,8785 8265,8895 8780,8895 8780,8255 ; 8110,6615 8225,6730 8225,7035 8335,7145 8850,7145 8850,6505 ; 8145,3950 8200,3895 8635,3895 8680,3940 ; 8215,2200 8270,2145 8705,2145 8750,2190 ; 8245,7965 8300,7910 8735,7910 8780,7955 ; 8315,6215 8370,6160 8805,6160 8850,6205 ; 8465,4330 8465,4040 8680,4040 ; 8535,2580 8535,2290 8750,2290 ; 8565,8345 8565,8055 8780,8055 ; 8635,6595 8635,6305 8850,6305 ; 10270,4330 10270,4080 10275,4075 10640,4075 ; 10340,2580 10340,2330 10345,2325 10710,2325 ; 10360,4330 10535,4330 ; 10370,8345 10370,8095 10375,8090 10740,8090 ; 10430,2580 10605,2580 ; 10440,6595 10440,6345 10445,6340 10810,6340 ; 10460,8345 10635,8345 ; 10530,6595 10705,6595 ; 10538.19,4571.26 10108.74,4571.26 10105,4575 10105,3985 10275,3985 10640,3985 10645,3980 10645,3750 11385,3750 11515,3880 11515,4080 11465,4130 11375,4130 ; 10608.19,2821.26 10178.74,2821.26 10175,2825 10175,2235 10345,2235 10710,2235 10715,2230 10715,2000 11455,2000 11585,2130 11585,2330 11535,2380 11445,2380 ; 10635,4340 10750,4455 10750,4760 10860,4870 11375,4870 11375,4230 ; 10638.19,8586.26 10208.74,8586.26 10205,8590 10205,8000 10375,8000 10740,8000 10745,7995 10745,7765 11485,7765 11615,7895 11615,8095 11565,8145 11475,8145 ; 10705,2590 10820,2705 10820,3010 10930,3120 11445,3120 11445,2480 ; 10708.19,6836.26 10278.74,6836.26 10275,6840 10275,6250 10445,6250 10810,6250 10815,6245 10815,6015 11555,6015 11685,6145 11685,6345 11635,6395 11545,6395 ; 10735,8355 10850,8470 10850,8775 10960,8885 11475,8885 11475,8245 ; 10805,6605 10920,6720 10920,7025 11030,7135 11545,7135 11545,6495 ; 10840,3940 10895,3885 11330,3885 11375,3930 ; 10910,2190 10965,2135 11400,2135 11445,2180 ; 10940,7955 10995,7900 11430,7900 11475,7945 ; 11010,6205 11065,6150 11500,6150 11545,6195 ; 11160,4320 11160,4030 11375,4030 ; 11230,2570 11230,2280 11445,2280 ; 11260,8335 11260,8045 11475,8045 ; 11330,6585 11330,6295 11545,6295